# Allegro board PROIECT.brd
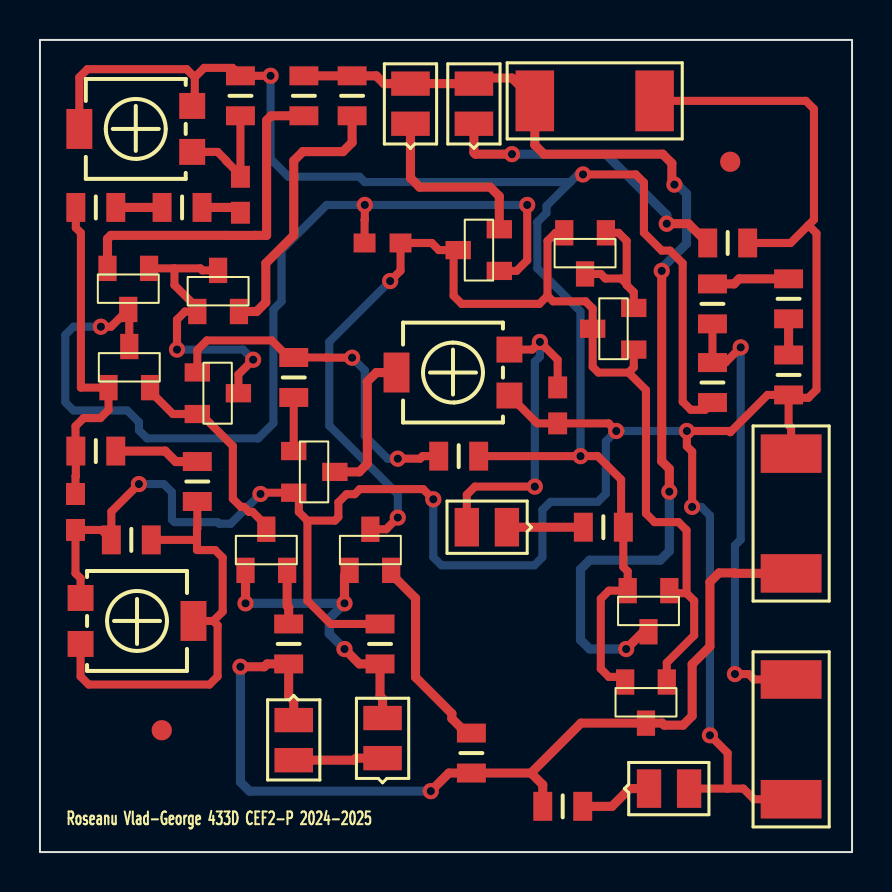
[diagram p0: board, top side]
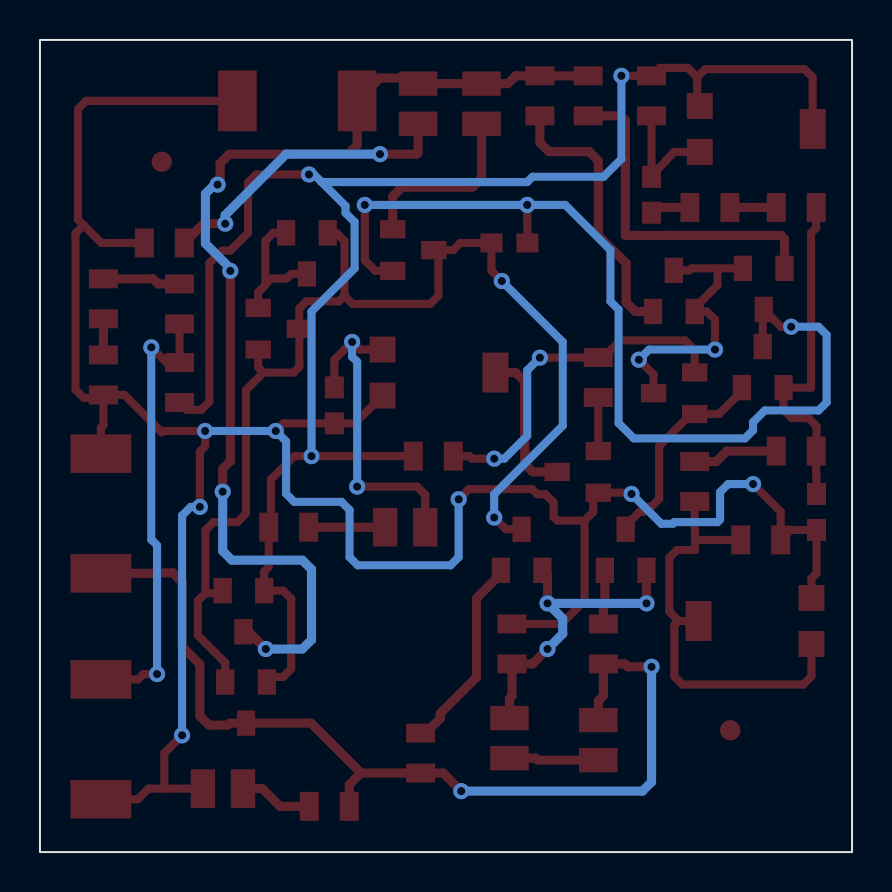
[diagram p1: board, bottom side, seen from below]

Outline 40.64 x 40.64 mm; copper layers: TOP, BOTTOM. Coordinates in mm from the lower left corner of the outline.
Outline path: rectangle 0,0 40.64,40.64

## Design rules (mm)
nets with their own width: min track width 0.406; nets 0 N160195 N160219 N160357 N160581 N160591 N160717 N160895 N171625 N176671 N215103 OUT V+ V-
nets with their own width: min track width 0.457; nets N161091 N161155 N161161 N162230 N195110 N205245 N211163 N1619521 N1675000 N1678791 N1697121 N1991281 N1992331 N2003380 N2011821 N2011981 VCC+ VCC-

## Placement (name value [footprint] x y rotation side)
C1  2.2n  [CAPC2008X126N_0805]  10.03 32.89 90 top
C2  2.2n  [CAPC2008X126N_0805]  1.78 17.02 90 top
C3  100p  [CAPC2008X126N_0805]  17.14 30.48 180 top
C4  470n  [CAPC2008X126N_0805]  25.91 22.35 90 top
D1  5V,LED,LED  [SMD0805]  21.72 36.45 90 top
D2  5V,LED,LED  [SMD0805]  30.48 3.17 0 top
J1  CON2  [SMR2512]  24.77 37.59 0 top
J2  CON2  [SMR2512]  37.59 19.94 270 top
J3  CON2  [SMR2512]  37.59 8.64 270 top
NOREF  -  [unnamed]  34.54 34.54 0 top
NOREF#2  -  [unnamed]  6.1 6.1 0 top
P1  10k  [TS53YL]  7.62 37.34 0 top
P2  10k  [TS53YL]  2.03 10.41 180 top
P3  500k  [TS53YL]  23.5 25.15 0 top
Q1  QBC846B  [TO236AA]  3.43 23.24 270 top
Q2  QBC846B  [TO236AA]  7.87 24 180 top
Q3  QBC856B  [TO236AA]  5.46 29.21 90 top
Q4  QBC856B  [TO236AA]  7.87 27.05 270 top
Q5  QBC856B  [TO236AA]  22.99 29.08 0 top
Q6  QBC846B  [TO236AA]  31.5 13.08 90 top
Q7  QBC856B  [TO236AA]  31.37 8.51 90 top
Q8  QBC846B  [TO236AA]  15.49 14.1 270 top
Q9  QBC846B  [TO236AA]  10.29 14.1 270 top
Q10  JMMBFJ309LT1  [TO236AA]  12.7 20.07 180 top
Q11  QBC856B  [TO236AA]  28.32 30.99 90 top
Q12  QBC856B  [TO236AA]  29.72 25.15 0 top
R1  15k  [RES2012X50N_0805]  10.03 37.85 90 top
R4  1k  [RES2012X50N_0805]  7.11 32.26 0 top
R5  150  [RES2012X50N_0805]  2.79 32.26 0 top
R6  1k  [RES2012X50N_0805]  2.79 20.07 180 top
R7  150  [RES2012X50N_0805]  7.87 18.54 90 top
R8  15k  [RES2012X50N_0805]  4.57 15.62 0 top
R11  51  [RES2012X50N_0805]  13.21 37.85 90 top
R12  51  [RES2012X50N_0805]  15.62 37.85 90 top
R13  330  [RES2012X50N_0805]  34.42 30.48 0 top
R14  100k  [RES2012X50N_0805]  33.66 23.5 90 top
R15  10k  [RES2012X50N_0805]  33.66 27.43 270 top
R16  10k  [RES2012X50N_0805]  37.47 27.69 90 top
R17  1k  [RES2012X50N_0805]  37.47 23.88 90 top
R18  330  [RES2012X50N_0805]  26.16 2.29 0 top
R19  510  [RES2012X50N_0805]  21.59 4.95 90 top
R20  680  [RES2012X50N_0805]  12.45 10.41 90 top
R21  10k  [RES2012X50N_0805]  17.02 10.41 270 top
R22  10k  [RES2012X50N_0805]  12.7 23.75 270 top
R23  22k  [RES2012X50N_0805]  20.95 19.81 180 top
R24  1k  [RES2012X50N_0805]  28.19 16.26 0 top
U3  1N4148  [SMD0805]  23.37 16.26 180 top
U4  1N4148  [SMD0805]  17.14 4.7 90 top
U5  1N4148  [SMD0805]  12.7 6.6 270 top
U6  1N4148  [SMD0805]  18.54 36.45 90 top

## Library data of the parts
C1-C4 = C
D1 D2 = LED_0
J1-J3 = CON2
P1-P3 = POT
Q1 Q2 Q6 Q8 Q9 = QBC846B_0
Q3-Q5 Q7 Q11 Q12 = QBC856B_0
Q10 = JMMBFJ309LT1_0
R1 R4-R8 R11-R24 = R
U3 = 1N4148_6
U4 = 1N4148_7
U5 = 1N4148_8
U6 = 1N4148_5

## Footprints (pads in the part's own frame, mm; a bottom-side part is the same pattern mirrored in y, then rotated)
CAPC2008X126N_0805
  rect 1.1x0.95 smd: 1(-0.9,0) 2(0.9,0)
RES2012X50N_0805
  rect 0.95x1.45 smd: 1(-1,0) 2(1,0)
SMD0805
  rect 1.219x1.93 smd: A(2.007,0) C(0,0)
SMR2512
  rect 1.93x3.048 smd: 1(0,0) 2(5.994,0)
TO236AA
  rect 1.27x0.914 smd: 1(0,0) 2(0,2.083) 3(-2.057,1.041)
TS53YL
  rect 1.3x1.3 smd: 1(0,0) 3(0,-2.3)
  rect 1.3x2 smd: 2(-5.65,-1.15)
unnamed
  round 1.016 smd: (0,0)

## Nets
VCC+: D1.A J1.1 Q6.3 R11.2 R12.2 U6.A
VCC-: J2.2 Q7.3 R18.1 R19.1 R20.1 U5.C
0: C2.1 C4.1 D2.A J1.2 J2.1 J3.2 P2.3 P3.3 Q10.2(S) R8.1 R13.2 R17.1 R21.1
OUT: P1.1 P1.2(T) Q6.2(E) Q7.2(E) R1.2 R14.1 R23.1 R24.2
V+: C2.2 Q1.1 R5.1 R6.2
V-: Q2.1 R22.1 R23.2
N160195: Q2.3 Q3.1 Q4.1 Q4.3
N160219: C3.2 Q1.3 Q3.3 Q5.1
N160357: C3.1 Q5.3 Q6.1 Q7.1 Q8.3 Q11.2(E) Q12.1 Q12.3
N160581: J3.1 R14.2 R15.2
N160591: Q1.2(E) Q2.2(E) Q9.3
N160717: C4.2 P3.1 U3.A
N160895: P2.1 P2.2(T) R7.1 R8.2
N161091: Q8.1 Q9.1 R21.2 U4.A
N161155: Q9.2(E) R20.2
N161161: Q8.2(E) R19.2
N162230: U4.C U5.A
N171625: C1.2 P1.3 R1.1
N176671: Q10.1 R22.2
N195110: D1.C R13.1
N205245: D2.C R18.2
N211163: Q5.2(E) U6.C
N215103: Q11.1 Q11.3 Q12.2(E)
N1619521: R24.1 U3.C
N1675000: C1.1 R4.2
N1678791: R6.1 R7.2
N1697121: R4.1 R5.2
N1991281: Q4.2(E) R12.1
N1992331: Q3.2(E) R11.1
N2003380: P3.2(T) Q10.3
N2011821: R15.1 R16.2
N2011981: R16.1 R17.2

## Via types
v1: diameter 0.813, hole 0.406, TOP to BOTTOM, 34 vias

## Routing (per net, layer and track width the routed paths; a pad name or vN(x,y) marks a point on that pad's centre or on a via; arc(x,y) is an arc through that point)
VCC+: length 54.5
  TOP w0.457: v1(29.34,10.16) 30.2,11.02 Q6.3 ; v1(31.5,18.03) 31.5,19.18 31.11,19.56 v1(31.11,29.08) ; v1(31.75,33.4) 31.62,33.53 31.62,34.47 31.17,34.92 25.22,34.92 24.77,35.38 J1.1 23.62,38.73 22,38.73 D1.A U6.A 17.22,38.46 16.83,38.85 R12.2 R11.2
  BOTTOM w0.457: v1(29.34,10.16) 27.51,10.16 27.05,10.62 27.05,14.15 27.51,14.61 31.04,14.61 31.5,15.06 v1(31.5,18.03) ; v1(31.11,29.08) 31.11,29.21 32.36,30.45 32.36,32.94 31.9,33.4 v1(31.75,33.4)
VCC-: length 48.8
  TOP w0.457: J2.2 34.77,13.94 34.75,13.97 33.99,13.97 33.53,13.51 33.53,10.29 32.64,9.4 32.64,6.81 32.18,6.35 31.24,6.35 31.14,6.45 Q7.3 27.07,6.45 24.58,3.95 ; 24.58,3.95 25.16,3.37 R18.1 ; 24.58,3.95 R19.1 20.46,3.95 v1(19.56,3.05) ; v1(10.03,9.27) 11.22,9.27 11.37,9.41 R20.1 12.45,7.82 12.7,7.57 U5.C
  BOTTOM w0.457: v1(19.56,3.05) 10.49,3.05 10.03,3.51 v1(10.03,9.27)
0: length 124.5
  TOP w0.406: 13.39,16.59 13.39,12.58 14.55,11.41 R21.1 ; 13.39,16.59 12.95,17.02 12.95,17.73 Q10.2 11.1,17.98 v1(11.04,17.92) ; 13.39,16.59 14.76,16.59 14.94,16.76 14.94,17.5 15.34,17.91 15.75,17.91 16,18.16 19.18,18.16 v1(19.68,17.65) ; 38.46,31.37 38.73,31.65 38.73,37.19 38.33,37.59 J1.2 ; 38.46,31.37 38.86,30.96 38.86,23.14 38.46,22.73 37.61,22.73 R17.1 ; 38.46,31.37 37.57,30.48 R13.2 ; 34.42,3.17 35.2,3.17 35.74,2.64 J3.2 ; 34.42,3.17 D2.A ; 34.42,3.17 34.42,4.95 v1(33.53,5.84) ; P3.3 24.89,21.45 C4.1 28.46,21.45 v1(28.84,21.07) ; v1(32.64,17.27) 32.64,20.04 32.37,20.31 v1(32.37,21.07) 34.48,21.07 34.54,21.01 36.41,22.88 R17.1 ; R17.1 37.47,21.36 37.59,21.23 J2.1 ; v1(4.95,18.41) 3.57,17.03 R8.1 3.07,16.12 C2.1 1.78,13.95 2.03,13.69 P2.3
  BOTTOM w0.406: v1(33.53,5.84) 33.53,16.84 33.1,17.27 v1(32.64,17.27) ; v1(19.68,17.65) 19.68,14.76 20.09,14.35 24.74,14.35 25.15,14.76 25.15,17.12 25.55,17.53 27.91,17.53 28.32,17.93 28.32,20.55 v1(28.84,21.07) v1(32.37,21.07) ; v1(4.95,18.41) 6.2,18.41 6.6,18.01 6.6,16.64 6.73,16.51 8.89,16.51 8.97,16.43 9.55,16.43 v1(11.04,17.92)
OUT: length 86.9
  TOP w0.406: R14.1 33.29,22.13 32.57,22.13 32.16,22.54 32.16,29.46 31.53,30.1 31.11,30.1 30.23,30.99 30.23,33.5 29.82,33.91 v1(27.18,33.91) ; R23.1 v1(27.05,19.81) 27.91,19.81 29.08,18.64 29.08,16.37 R24.2 29.19,14.27 29.41,14.05 Q6.2 28.47,13.08 28.07,12.67 28.07,9.17 28.47,8.76 29.03,8.76 Q7.2 ; P1.1 7.75,37.47 7.75,38.77 ; 7.75,38.77 7.34,39.18 2.38,39.18 1.97,38.77 P1.2 ; 7.75,38.77 8.22,39.24 9.64,39.24 R1.2 v1(11.54,38.85)
  BOTTOM w0.406: 26.54,33.53 26.92,33.91 v1(27.18,33.91) ; 26.54,33.53 25.35,32.33 25.35,31.98 24.89,31.53 24.89,29.21 27.05,27.05 v1(27.05,19.81) ; 26.54,33.53 16.26,33.53 15.99,33.8 12.43,33.8 11.54,34.69 v1(11.54,38.85)
V+: length 17
  TOP w0.406: C2.2 1.78,18.8 1.79,18.81 R6.2 1.78,20.08 1.78,21.31 2.18,21.72 3.02,21.72 3.43,22.12 Q1.1 2.05,23.24 2.05,30.99 1.79,31.24 R5.1
V-: length 17.8
  TOP w0.406: v1(15.62,24.74) 14.34,24.74 14.33,24.75 R22.1 12.45,24.75 11.6,25.6 8.36,25.6 7.87,25.12 Q2.1 ; R23.2 19.15,19.81 19.02,19.68 v1(17.91,19.68)
  BOTTOM w0.406: v1(17.91,19.68) 17.4,19.68 16.26,20.83 16.26,24.1 v1(15.62,24.74)
N160195: length 14.8
  TOP w0.406: 6.73,29.21 8.03,29.21 8.13,29.11 Q4.3 ; 6.73,29.21 6.73,28.37 7.87,27.23 Q4.1 7.26,27.05 6.86,26.64 v1(6.86,25.15) ; 6.73,29.21 Q3.1 ; v1(10.67,24.64) 9.93,23.9 Q2.3
  BOTTOM w0.406: v1(6.86,25.15) 10.16,25.15 v1(10.67,24.64)
N160219: length 49
  TOP w0.406: v1(24.38,32.38) 24.38,29.62 23.85,29.08 Q5.1 ; C3.2 16.25,31.64 16.26,31.65 v1(16.26,32.38) ; v1(3.05,26.29) 3.56,26.29 Q3.3 4.47,27.1 Q1.3
  BOTTOM w0.406: v1(24.38,32.38) v1(16.26,32.38) 14.35,32.38 12.09,30.12 12.09,27.56 11.68,27.15 11.68,21.46 10.92,20.7 5.36,20.7 4.95,21.11 4.95,21.51 4.37,22.1 1.68,22.1 1.27,22.5 1.27,25.88 1.68,26.29 v1(3.05,26.29)
N160357: length 60.1
  TOP w0.406: 25.4,27.84 25.4,30.58 25.81,30.99 Q11.2 ; 25.4,27.84 24.99,27.43 21.11,27.43 20.7,27.84 20.7,29.9 Q5.3 19.96,30.12 19.61,30.48 C3.1 18.04,29.09 v1(17.53,28.57) ; 25.4,27.84 25.68,27.56 27.3,27.56 27.66,27.2 Q12.3 27.66,24.28 27.95,23.99 29.46,23.99 ; 29.46,23.99 30.33,23.12 30.33,16.94 30.76,16.51 31.95,16.51 32.36,16.1 32.36,12.95 ; 29.46,23.99 29.72,24.26 Q12.1 ; 32.36,12.95 32.74,12.57 32.74,10.85 31.37,9.47 Q7.1 ; 32.36,12.95 31.62,12.95 Q6.1 ; Q8.3 17.32,16.15 v1(17.91,16.74)
  BOTTOM w0.406: v1(17.53,28.57) 14.48,25.53 14.48,21.34 17.91,17.91 v1(17.91,16.74)
N160581: length 23.1
  TOP w0.406: v1(35.07,25.26) 34.31,24.49 R14.2 R15.2 ; J3.1 35.74,8.64 35.47,8.91 v1(34.78,8.91)
  BOTTOM w0.406: v1(34.78,8.91) 34.78,15.35 35.07,15.64 v1(35.07,25.26)
N160591: length 10.5
  TOP w0.406: Q9.3 11.33,16.33 10.64,17.02 10.46,17.02 10.21,17.27 10.06,17.27 9.65,17.68 9.65,20.32 8.05,21.92 Q2.2 6.65,21.92 5.51,23.06 Q1.2
N160717: length 16.9
  TOP w0.406: C4.2 25.91,24.64 v1(25.02,25.53) 24.64,25.15 P3.1 ; 21.34,16.28 U3.A 21.36,17.88 21.77,18.29 v1(24.77,18.29)
  BOTTOM w0.406: v1(24.77,18.29) 24.77,24.54 25.02,24.79 v1(25.02,25.53)
N160895: length 22.2
  TOP w0.406: R7.1 7.87,16.18 7.86,16.17 7.86,15.62 ; 8.68,11.56 9.14,12.03 9.14,14.73 8.76,15.11 7.86,15.11 7.86,15.62 ; 8.68,11.56 8.89,11.35 8.89,8.79 8.48,8.38 2.44,8.38 2.03,8.79 P2.1 ; 8.68,11.56 P2.2 ; 7.86,15.62 R8.2
N161091: length 16.1
  TOP w0.457: v1(15.24,10.16) 15.99,9.41 R21.2 17.02,7.8 17.14,7.67 U4.A ; v1(15.24,12.45) 15.24,13.84 Q8.1 ; Q9.1 v1(10.29,12.45)
  BOTTOM w0.457: v1(15.24,10.16) 14.48,10.92 14.48,11.68 v1(15.24,12.45) v1(10.29,12.45)
N161155: length 2.7
  TOP w0.457: Q9.2 12.37,12.32 12.45,12.24 R20.2
N161161: length 10
  TOP w0.457: Q8.2 17.58,13.92 18.8,12.7 18.8,8.75 20.61,6.93 20.61,6.68 21.34,5.95 R19.2
N162230: length 4.5
  TOP w0.457: U4.C 15.82,4.7 15.72,4.6 U5.A
N171625: length 6
  TOP w0.406: 10.03,33.87 9.32,34.58 9.32,34.6 8.89,35.04 P1.3 ; 10.03,33.87 C1.2 ; 10.03,33.87 R1.1
N176671: length 2.7
  TOP w0.406: R22.2 Q10.1
N195110: length 15.3
  TOP w0.457: v1(23.62,34.92) 21.79,34.92 21.72,35 D1.C ; R13.1 32.45,31.45 v1(31.37,31.45)
  BOTTOM w0.457: v1(31.37,31.45) 31.37,31.88 28.32,34.92 v1(23.62,34.92)
N205245: length 3.7
  TOP w0.457: R18.2 28.63,2.29 29.51,3.17 D2.C
N211163: length 9.2
  TOP w0.457: U6.C 18.54,33.73 19,33.27 22.53,33.27 22.99,32.82 Q5.2
N215103: length 7
  TOP w0.406: Q11.3 28.07,28.93 28.3,28.7 29.08,28.7 29.36,28.42 ; Q11.1 28.96,30.99 29.36,30.58 29.36,28.42 ; Q12.2 29.72,28.02 29.36,28.37 29.36,28.42
N1619521: length 3.8
  TOP w0.457: U3.C R24.1
N1675000: length 2.3
  TOP w0.457: 8.11,32.01 R4.2 9.77,32.26 C1.1
N1678791: length 4.3
  TOP w0.457: R6.1 6.27,20.07 6.79,19.54 R7.2
N1697121: length 2.3
  TOP w0.457: R4.1 R5.2
N1991281: length 13.8
  TOP w0.457: R12.1 15.62,35.51 15.16,35.05 13.16,35.05 12.7,34.59 12.7,30.86 11.3,29.46 11.3,27.51 10.85,27.05 Q4.2
N1992331: length 17.2
  TOP w0.457: Q3.2 3.38,30.68 3.56,30.86 9.31,30.86 9.32,30.86 10.75,30.86 10.75,30.86 11.34,30.86 11.34,36.62 11.57,36.85 R11.1
N2003380: length 7.6
  TOP w0.457: P3.2 16.83,24 16.38,23.55 16.38,19.43 15.98,19.02 Q10.3
N2011821: length 3.9
  TOP w0.457: R16.2 34.99,28.69 34.74,28.43 R15.1
N2011981: length 1.8
  TOP w0.457: R16.1 R17.2

## Text on the board
Ref Des/Silkscreen Top: Roseanu Vlad-George 433D CEF2-P 2024-2025
XSECTION_CHART: *  SURFACE - AIR 0 MIL | L1 TOP CONDUCTOR - COPPER 0.72 MIL | *  DIELECTRIC - FR-4 62.56 MIL | L2 BOTTOM CONDUCTOR - COPPER 0.72 MIL | DESIGN CROSS SECTION CHART | ___________________________ | TOTAL THICKNESS 64 MIL | 1-2
DISPLAY_TOP: FIGURE | FINISHED_SIZE | 16.0 | DRILL CHART: TOP to BOTTOM | ALL UNITS ARE IN MILS | PLATED | QTY | 34
